# Altium PCB IC_PCB1.PcbDoc
Units mil, origin at the board's own origin, x right, y up, seen from the top; angles counter-clockwise.
Board outline 1574.8 x 1574.8 mil, 2 copper layers (Top Layer, Bottom Layer); 19 components, 16 nets, 71 pads, 0 vias.
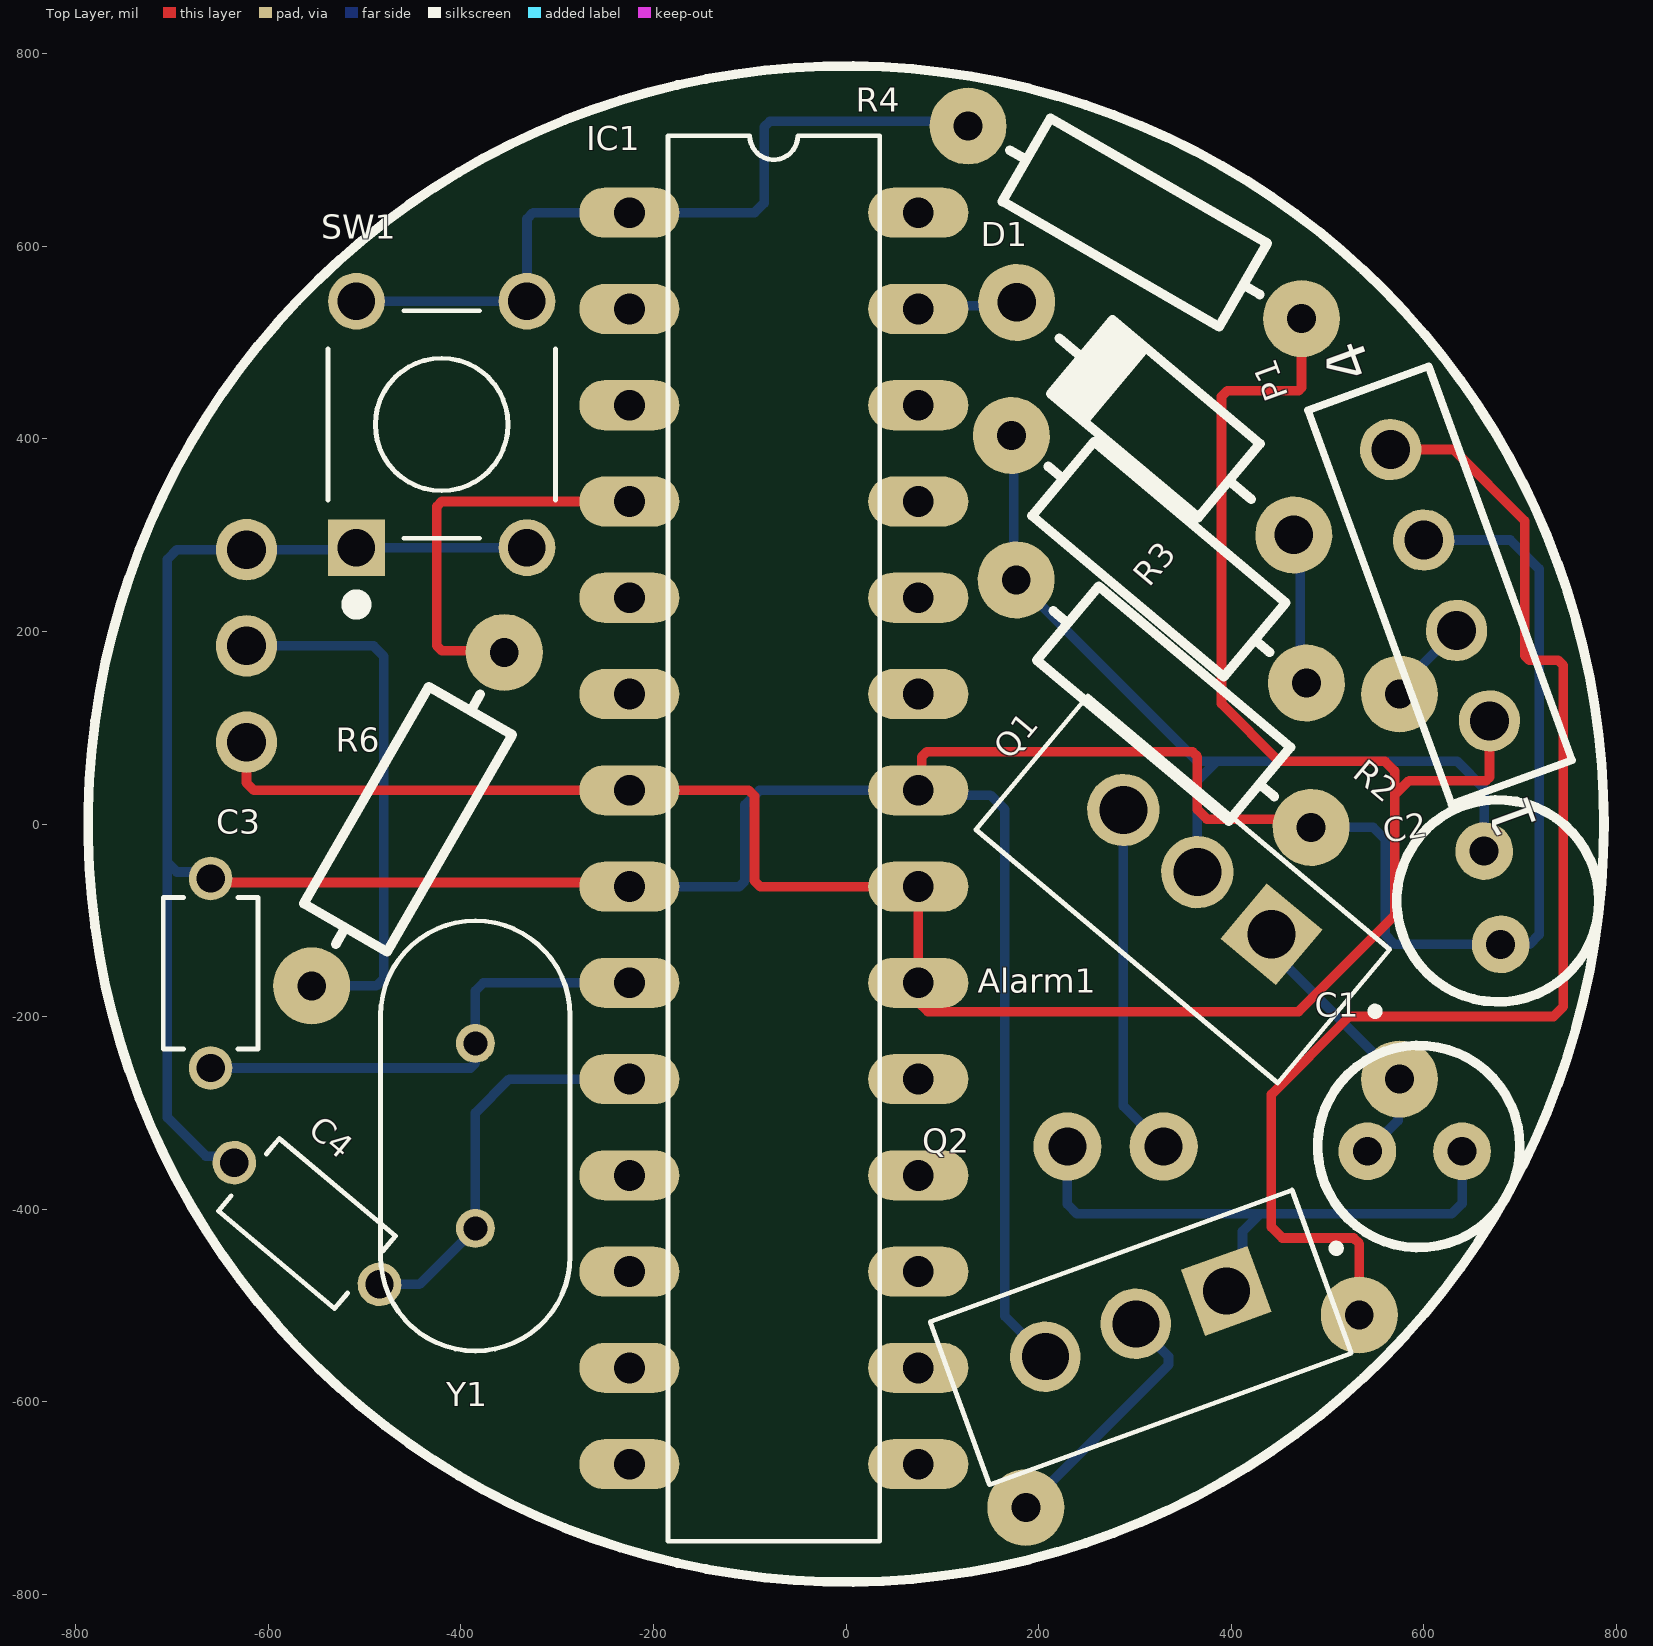
[diagram p0: Top Layer view]
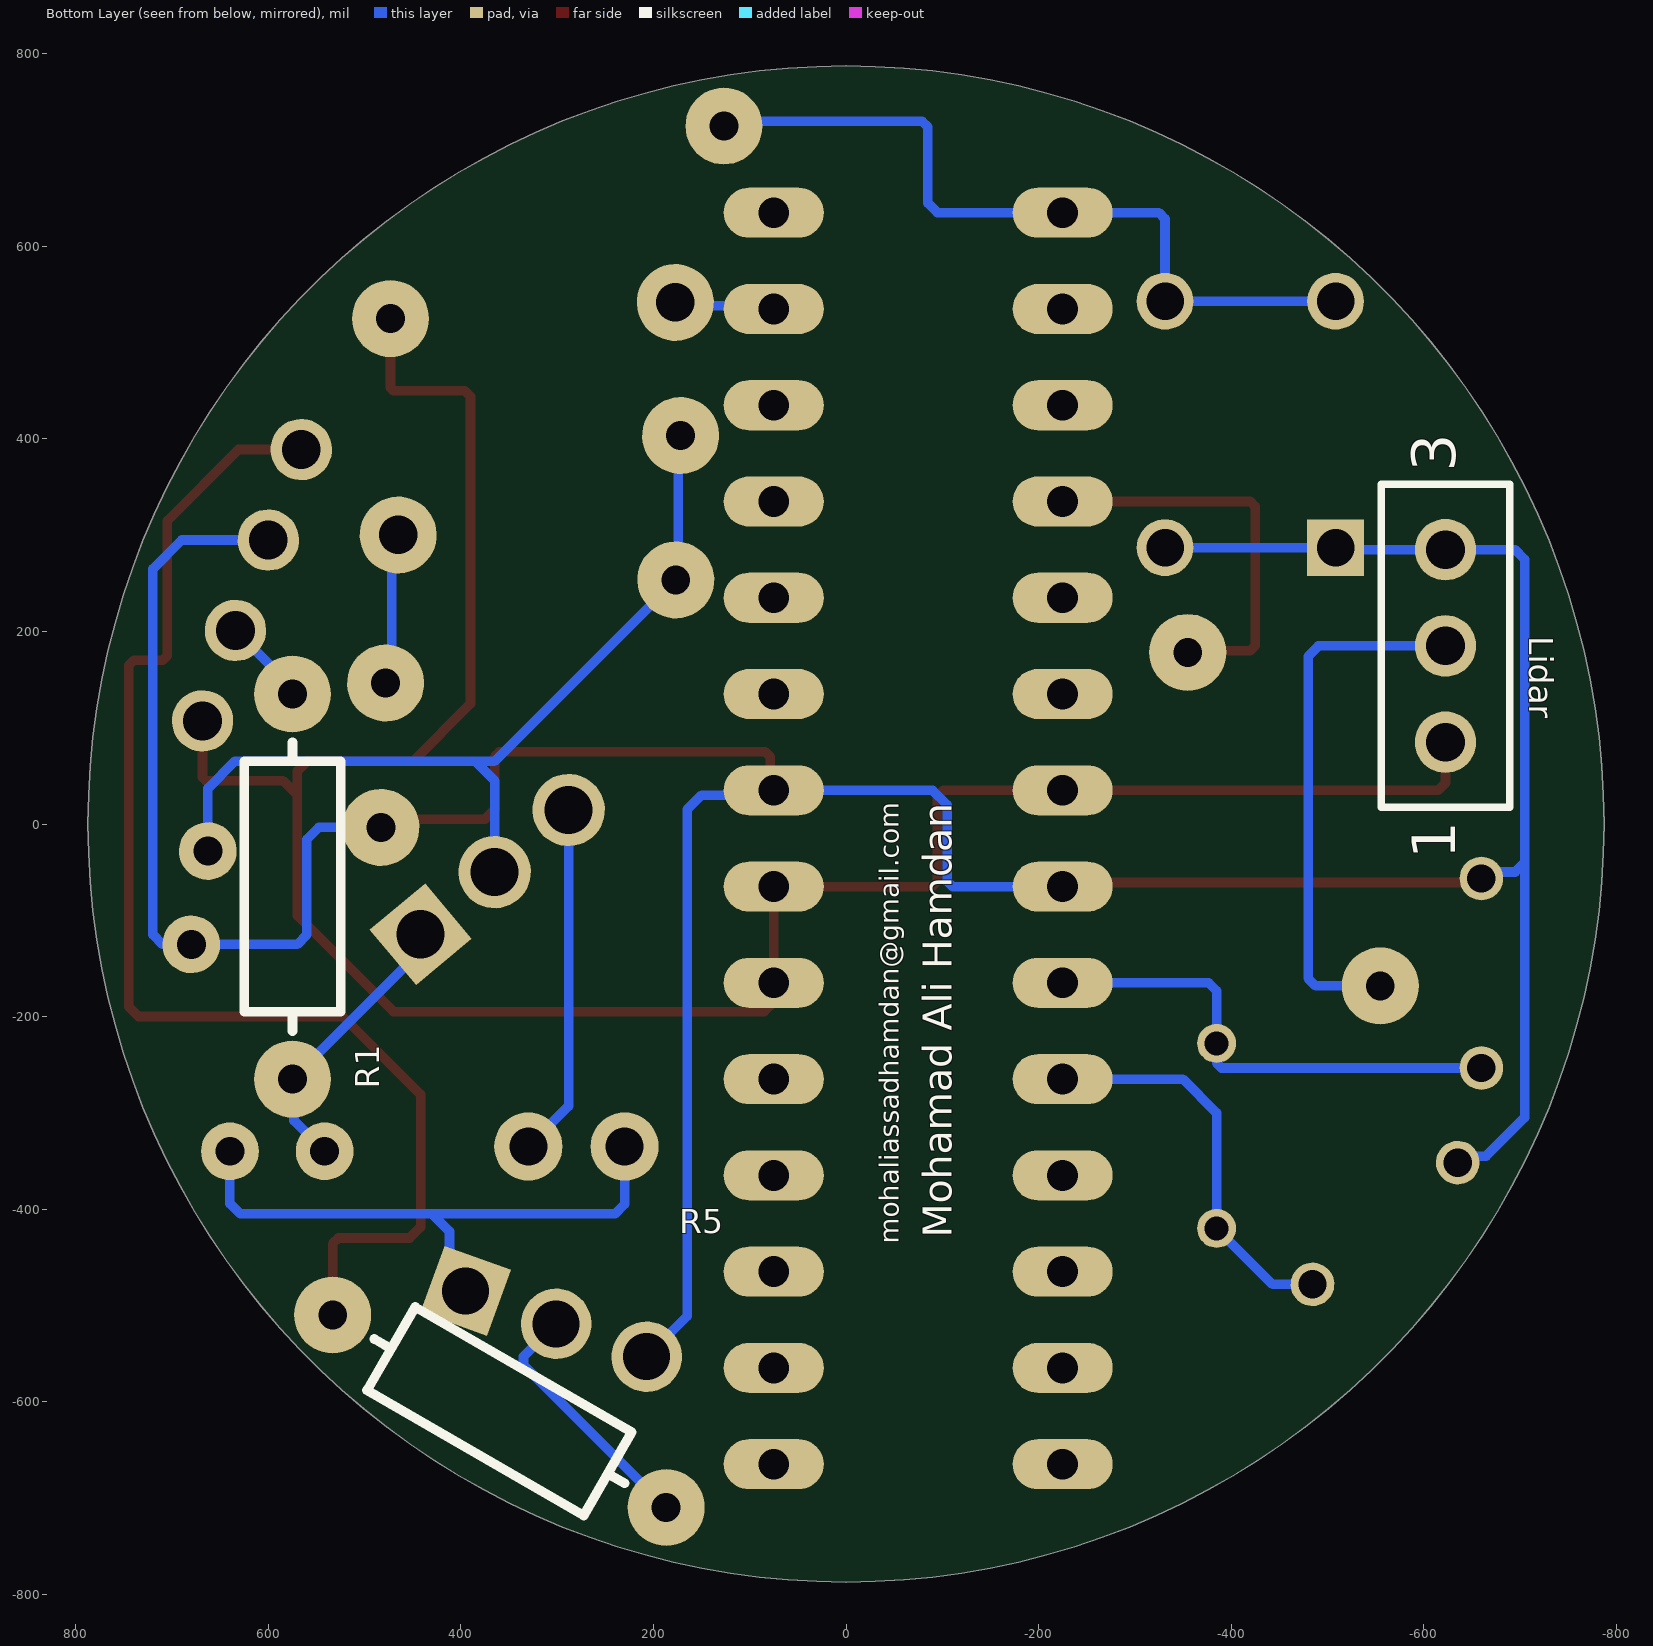
[diagram p1: Bottom Layer view, seen from below]
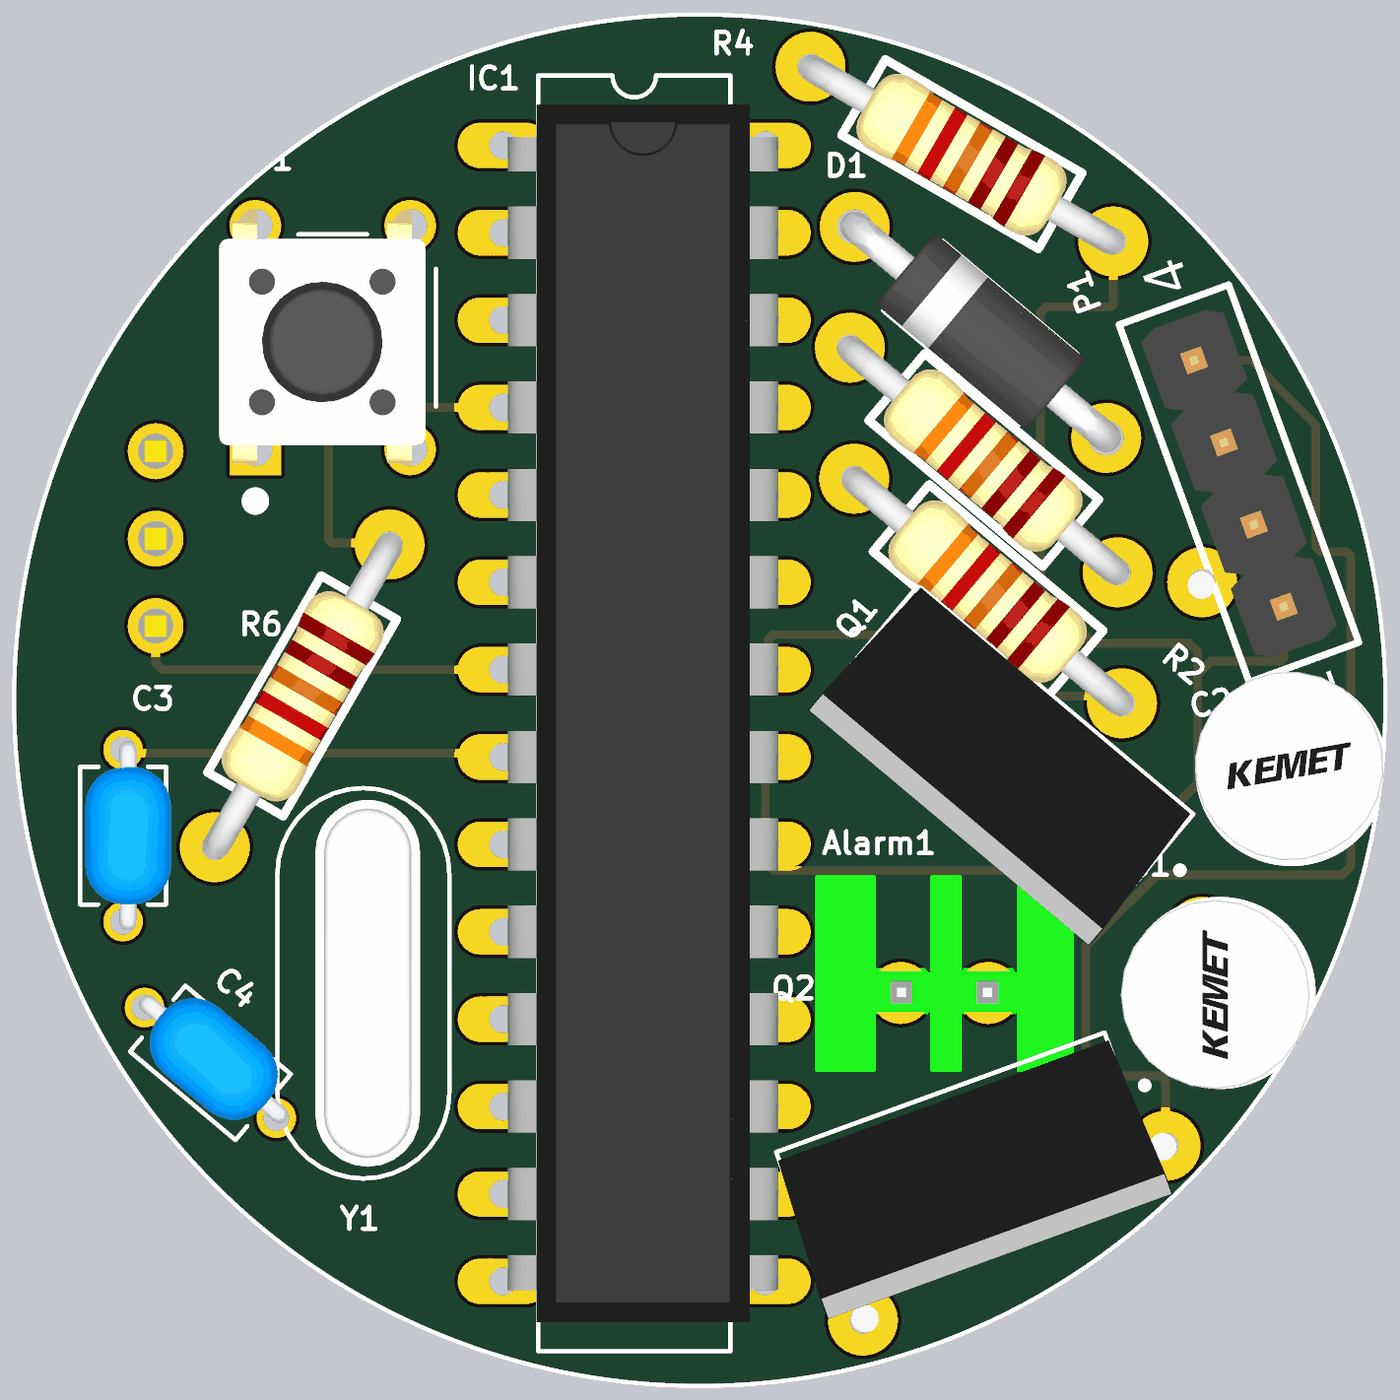
[diagram p2: 3D render of the assembled board from above, using the file's embedded part models]
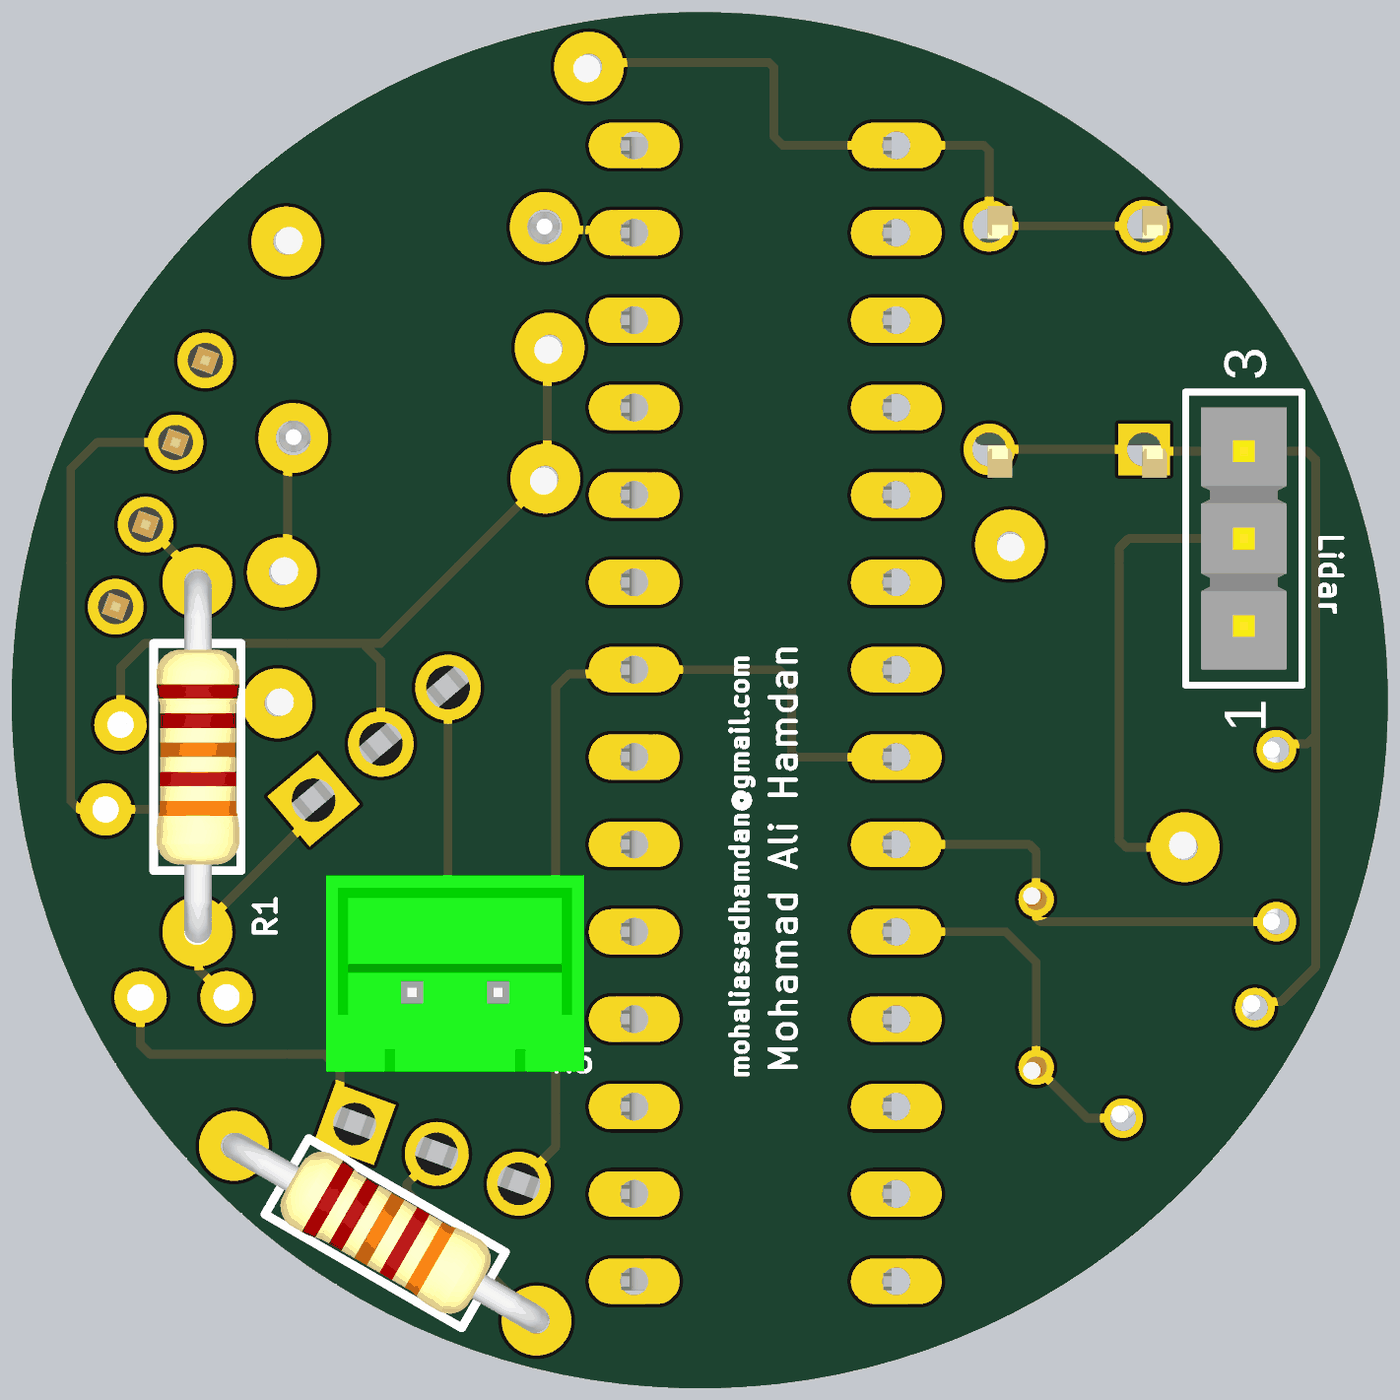
[diagram p3: 3D render of the assembled board from below, using the file's embedded part models]

## Layer stack, top to bottom
Top Solder: solder mask 0.4, Solder Resist, Dk 3.5
Top Layer: signal copper 1.4
Dielectric 1: dielectric 12.6, FR-4, Dk 4.8
Bottom Layer: signal copper 1.4
Bottom Solder: solder mask 0.4, Solder Resist, Dk 3.5

## Board outline
-787.4,0 ccw(c0,0) 0,-787.4 ccw(c0,0) 787.4,0 ccw(c0,0) 0,787.4 ccw(c0,0)

## Design rules (kind name [scope] priority, off if disabled: settings)
Clearance [All] p1: gap=10 ignorepadtopadclearanceinfootprint=FALSE except(0: Arc-Hole Track-Hole SMDPad-Hole THPad-Hole Via-Hole Fill-Hole Poly-Hole Region-Hole Text-Hole)
PolygonConnect [All] p1: connectstyle=Relief reliefconductorwidth=10 reliefentries=4 polygonreliefangle="90 Angle" airgapwidth=10
RoutingVias [All] p1: holewidth=28 width=50 viastyle="Through Hole" minholewidth=28 minwidth=50 maxholewidth=28 maxwidth=50
SolderMaskExpansion [All] p1: expansion=4
Width [All] p1: maxlimit=10 minlimit=10 preferedwidth=10
30 further rules are at their usual default settings.

## Components (designator, comment, footprint, x,y, rotation, side; value= is the part's Value field where it differs from the comment)
Alarm1 "Header 2" Connector_green_2pins 330,-335 r180 top
C1 "Cap2" Capacitor_polarized_100uF 640,-340 r180 top value=100uF
C2 "Cap2" Capacitor_polarized_100uF 680,-125 r100 top value=1uF
C3 "14pF" CAP_RDER71H333K0M1H03A -660,-155 r270 top
C4 "14pF" CAP_RDER71H333K0M1H03A -560,-415 r320 top
D1 "MBR360" "diode 4007" 430,395 r140 top
IC1 "ATMEGA328-PU" DIL28 -75,-15 r0 top
Lidar "SAMTEC-HTSW-103-07-X-SJ" SAMTEC-HTSW-103-07-X-S -622.72,185 r90 bottom
P1 "SAMTEC-HTSW-104-14-X-SJ" SAMTEC-HTSW-104-14-X-S 617.1,248.02 r110 top
Q1 "BT151" TO255P1040X460X1975-3 441.91,-114.53 r140 top
Q2 "IRL540" TO254P1054X470X1955-3 301.03,-519.2 r200 top
R1 "Res1" resistor 575,-65 r270 bottom value=10K
R2 "Res1" resistor 330,125 r140 top value=27K
R3 "Res1" resistor 325,275 r140 top value=27K
R4 "Res1" resistor 300,625 r150 top value=10K
R5 "Res1" resistor 360,-610 r210 bottom value=1K
R6 "Res1" resistor -455,5 r240 top value=1K
SW1 "FSM8JH" SW_FSM8JH -420,415 r90 top
Y1 "16MHZ" XTAL_ECS-160-20-4VX -385,-323.94 r90 top

## Footprints (in the part's own frame and the unit in brackets; to place one, negate y for a bottom-side part, rotate by r counter-clockwise, add the part's x,y. Pads: shape width x height; smd on the part's side, far side on the other; paste and mask are expansions set on the pad)
CAP_RDER71H333K0M1H03A [mm]
  round 1.15 hole 0.75: 1(-2.5,0) 2(2.5,0)
  silkscreen extent -2,-1.25 2,1.25, body extent -2.75,-1.1 3.68,4.32, height 7
Capacitor_polarized_100uF [mil] "Capacitor_polarized_100uF 25V"
  round 60 hole 30: +(98.43,0) -(0,0)
  silkscreen extent -60,-110 150,100, body extent -58,-112 158,105, height 591
Connector_green_2pins [mm] "Connector_green_2pins"
  round 1.8 hole 1: 1(0,0) 2(2.54,0)
  body extent -2.48,-3.41 5.02,2.29, height 3.3
DIL28 [mil]
  oval 104x52 hole 32: 1(-150,650) 2(-150,550) 3(-150,450) 4(-150,350) 5(-150,250) 6(-150,150) 7(-150,50) 8(-150,-50) 9(-150,-150) 10(-150,-250) 11(-150,-350) 12(-150,-450) 13(-150,-550) 14(-150,-650) 15(150,-650) 16(150,-550) 17(150,-450) 18(150,-350) 19(150,-250) 20(150,-150) 21(150,-50) 22(150,50) 23(150,150) 24(150,250) 25(150,350) 26(150,450) 27(150,550) 28(150,650)
  silkscreen extent -110,-730 110,730, body extent -145,-697 165,697, height 205
"diode 4007" [mil]
  round 80 hole 40: 1(-87.87,50) 2(287.87,50)
  silkscreen extent -30,0 230,100, body extent -104,-4 305,102, height 111
resistor [mil]
  round 80 hole 30: 1(200,0) 2(-200,0)
  silkscreen extent -150,-50 150,50, body extent -213,-46 213,48, height 91
SAMTEC-HTSW-103-07-X-S [mm]
  round 1.62 hole 1.02: 1(-2.54,0) 2(0,0) 3(2.54,0)
  silkscreen extent -4.26,-1.69 4.26,1.69, body extent -3.81,-1.24 3.81,1.24, height 8.38
SAMTEC-HTSW-104-14-X-S [mm]
  round 1.62 hole 1.02: 1(-3.81,0) 2(-1.27,0) 3(1.27,0) 4(3.81,0)
  silkscreen extent -5.53,-1.69 5.53,1.69, body extent -5.08,-1.27 5.08,1.27, height 8.77
SW_FSM8JH [mm]
  rect 1.498x1.498 hole 0.99: 1(-3.25,2.25)
  round 1.498 hole 0.99: 2(-3.25,-2.25) 3(3.25,2.25) 4(3.25,-2.25)
  silkscreen extent -4.95,-3 3,3, body extent -4.07,-2.69 3.82,3.3, height 9.5
TO254P1054X470X1955-3 [mm]
  rect 1.86x1.86 hole 1.24: 1(-2.54,0)
  round 1.86 hole 1.24: 2(0,0) 3(2.54,0)
  silkscreen extent -5.75,-1.9 5.08,2.67, body extent -5.33,-1.65 5.33,3.18, height 23.26
TO255P1040X460X1975-3 [mm]
  rect 1.91x1.91 hole 1.27: 1(0,0)
  round 1.91 hole 1.27: 2(2.55,0) 3(5.1,0)
  silkscreen extent -3.5,-1.7 7.75,2.9, body extent -2.79,-1.65 7.87,3.17, height 24.26
XTAL_ECS-160-20-4VX [mm]
  round 1.03 hole 0.63: 1(-2.44,0) 2(2.44,0)
  silkscreen extent -5.68,-2.5 5.68,2.5, body extent -5.33,-1.65 5.33,1.4, height 4.09

## Part data
Alarm1: "Header, 2-Pin", LatestRevisionDate=17-Jul-2002, LatestRevisionNote="Re-released for DXP Platform.", Publisher="Altium Limited"
C1 C2: "Capacitor", PackageDescription="Capacitor; 2 Leads", PackageReference=CAPR5-4X5, Published=23-Sep-2002, Publisher="Altium Limited"
C3 C4: library part RDER71H333K0M1H03A, "Lead capacitor X7R(EIA) with Capacitance 33000pF, Rated Voltage 50Vdc", Package="Radial Murata", Availability=Warning, BuyPart=22PF, MF=Murata, Mouser-Purchase-URL=https://snapeda.com/shop?store=Mouser&id=4546735, MP=RDER71H333K0M1H03A, Price=None, SnapEDA_Link=https://www.snapeda.com/parts/RDER71H333K0M1H03A/Murata/view-part/4546735/?ref=snap
D1: library part "Diode 10TQ035", "Schottky Rectifier", ComponentLink1Description="Manufacturer Link", ComponentLink1URL=http://www.irf.com/, ComponentLink2Description=Datasheet, ComponentLink2URL=http://www.irf.com/product-info/datasheets/data/10tq.pdf, DatasheetVersion=PD-2.057B, LatestRevisionDate=17-Jul-2002, LatestRevisionNote="Re-released for DXP Platform.", Note="Terminal 2 is the TAB and is electrically connected to the cathode", PackageDescription="TO, Thru-Hole, Vertical, Heatsink Mounted; 3 In-Line Leads (1 Absent); Pitch 2.54 mm", PackageReference=TO-220AC, PackageVersion=Feb-1998, Published=8-Jun-2000, Publisher="Altium Limited"
IC1: "AVR AVR® ATmega Microcontroller IC 8-Bit 20MHz 32KB _16K x 16_ FLASH 28-PDIP", Package="DIP-28 Microchip Technology", Availability=Unavailable, MF="Microchip Technology", MP=ATMEGA328-PU, Price=None, SnapEDA_Link=https://www.snapeda.com/parts/ATMEGA328-PU/Microchip/view-part/4327846/?ref=snap
Q1: library part SCR, "Silicon Controlled Rectifier", Code_JEDEC=TO-220-AB, LatestRevisionDate=17-Jul-2002, LatestRevisionNote="Re-released for DXP Platform.", PackageReference=TO-220-AB, Published=8-Jun-2000, Publisher="Altium Limited"
Q2: library part MOSFET-N, "N-Channel MOSFET", LatestRevisionDate=17-Jul-2002, LatestRevisionNote="Re-released for DXP Platform.", PackageDescription="TO, Flat Index; 3 In-Line, Axial Leads; Body Dia. 4.6mm; Lead Dia. 0.5 mm (max)", PackageReference=E3, PackageVersion=1995/1996, Published=8-Jun-2000, Publisher="Altium Limited"
R1 R2 R3 R4 R5 R6: "Resistor", LatestRevisionDate=17-Jul-2002, LatestRevisionNote="Re-released for DXP Platform.", PackageDescription="Axial Device, Thru-Hole; 2 Leads; 0.3 in Pin Spacing", PackageReference=AXIAL-0.3, Published=8-Jun-2000, Publisher="Altium Limited"
SW1: "Tactile Switch SPST-NO Top Actuated Through Hole", Package=None, Availability=Unavailable, MF="TE Connectivity", MP=FSM8JH, Price=None, SnapEDA_Link=https://www.snapeda.com/parts/FSM8JH/TE%20Connectivity%20ALCOSWITCH%20Switches/view-part/139741/?ref=snap, TE_purchase_URL=https://www.te.com/usa-en/product-FSM8JH.html?te_bu=Cor&te_type=disp&te_campaign=seda_glo_cor-seda-global-disp-prtnr-fy19-seda-model-bom-cta_sma-317_1&elqCampaignId=32493
Y1: library part ECS-160-20-4VX, "16MHz ±30ppm Crystal 20pF 50 Ohms HC-49/US", Package="HC49/US ECS International", Availability=Unavailable, MF="ECS Inc.", MP=ECS-160-20-4VX, Price=None, SnapEDA_Link=https://www.snapeda.com/parts/ECS-160-20-4VX/ECS%20Inc./view-part/47293/?ref=snap

## Nets (pads, with @x,y where several pads share a name; then routed paths per layer and width w, separated by ;. In a path a pad name is that pad's centre, name@x,y a point inside that pad or via, vN(x,y) a via of type N, cw(c..) or ccw(c..) an arc to the next point about the centre after c; other vN are vias at no path point)
+5V: IC1.7 IC1.20 IC1.21 Lidar.1 P1.1 R4.2 | length 2498.5
  Top Layer w10: Lidar.1 -622.72,42.72 -615,35 IC1.7 -100.86,35 -95,29.14 -95,-59.14 -89.14,-65 IC1.21 IC1.20 75,-185 85,-195 470,-195 570,-95 570,30 ; R4.2 473.21,453.21 470,450 395.86,450 390,444.14 390,125 450,65 560,65 570,55 570,30 ; P1.1 668.4,48.4 665,45 585,45 570,30
After_One_sec_ON: P1.4 R5.2 | length 1360.1
  Top Layer w10: R5.2 533.21,-435.86 527.35,-430 453.21,-430 441.91,-418.7 441.91,-280.86 522.76,-200 735,-200 745,-190 745,165 740,170 710,170 705,175 705,315 631.03,388.97 P1.4
Alarm: D1.2 IC1.27 | length 105.1
  Bottom Layer w10: IC1.27 78.37,538.37 173.97,538.37 D1.2
GND: C2.- C3.1 C4.1 IC1.8 IC1.22 Lidar.3 P1.3 Q2.3 R2.2 SW1.1 SW1.2 | length 4012.7
  Top Layer w10: C3.1 -655.79,-60.79 -229.21,-60.79 IC1.8 ; IC1.22 78.75,38.75 78.75,70 83.75,75 360,75 365,70 365,15 375,5 463.21,5 483.21,25 R2.2
  Bottom Layer w10: C3.1 -666.75,-49.83 -695.17,-49.83 -705,-40 ; C4.1 -642.15,-344.98 -665.02,-344.98 -705,-305 -705,-40 ; SW1.2 SW1.1 -510.63,285 Lidar.3 -695,285 -705,275 -705,-40 ; IC1.8 -110.86,-65 -105,-59.14 -105,20 -90,35 IC1.22 80,30 150,30 165,15 165,-511.34 Q2.3 ; R2.2 547.7,-3.56 560,-15.86 560,-115 570,-125 C2.- 710,-125 720,-115 720,265 690,295 P1.3
NetAlarm1_1: Alarm1.1 Q1.3 | length 366.9
  Bottom Layer w10: Q1.3 288.09,-293.09 Alarm1.1
NetAlarm1_2: Alarm1.2 C1.- Q2.1 | length 627.3
  Bottom Layer w10: Alarm1.2 230,-395 240,-405 430,-405 ; Q2.1 411.88,-468.12 411.88,-423.12 430,-405 ; C1.- 640,-394.2 629.2,-405 430,-405
NetC1_1: C1.+ Q1.1 R1.1 | length 294.4
  Bottom Layer w10: Q1.1 441.91,-131.91 R1.1 573.39,-266.61 573.39,-308.18 C1.+
NetC2_1: C2.+ Q1.2 R2.1 R3.1 | length 916.3
  Bottom Layer w10: R3.1 174.29,401.06 174.29,256.06 R2.1 365.35,65 385,65 ; Q1.2 365,45 385,65 ; C2.+ 662.91,37.09 635,65 385,65
NetC3_2: C3.2 IC1.9 Y1.2 | length 515.7
  Bottom Layer w10: C3.2 -390,-253.43 -385,-248.43 Y1.2 -385,-173.21 -376.79,-165 IC1.9
NetC4_2: C4.2 IC1.10 Y1.1 | length 418.2
  Bottom Layer w10: C4.2 -443.27,-478.27 Y1.1 -385,-300 -350,-265 IC1.10
NetD1_1: D1.1 R3.2 | length 159.2
  Bottom Layer w10: D1.1 471.69,293.7 471.69,152.96 R3.2
NetIC1_1: IC1.1 R4.1 SW1.3 SW1.4 | length 811.4
  Bottom Layer w10: SW1.3 SW1.4 -331.42,628.58 -325,635 IC1.1 -95,635 -85,645 -85,724.14 -79.14,730 121.79,730 R4.1
NetIC1_4: IC1.4 R6.2 | length 429.5
  Top Layer w10: R6.2 -356.8,180 -420,180 -425,185 -425,330 -420,335 IC1.4
  Bottom Layer w10: R6.2@-361.8,185 R6.2
NetQ2_2: Q2.2 R5.1 | length 266.3
  Bottom Layer w10: R5.1 335,-561.79 335,-553.17 Q2.2
Pic: Lidar.2 R6.1 | length 560
  Bottom Layer w10: Lidar.2 -490.86,185 -480,174.14 -480,-160.4 -487.81,-168.21 R6.1
Vturbine: P1.2 R1.2 | length 90.6
  Bottom Layer w10: R1.2 575,141.83 P1.2
pads on no net: IC1.2 IC1.3 IC1.5 IC1.6 IC1.11 IC1.12 IC1.13 IC1.14 IC1.15 IC1.16 IC1.17 IC1.18 IC1.19 IC1.23 IC1.24 IC1.25 IC1.26 IC1.28

## Silkscreen, mask and mechanical layers (free items; w line width, h text height)
Top Overlay:
  circle w10: c0,0 r787.4
Bottom Overlay:
  text "Mohamad Ali Hamdan" at -110,-430 h30 r270
  text "mohaliassadhamdan@gmail.com" at -55,-435.86 h20 r270

## Text inside footprints (layer, text, board x,y; h text height)
Lidar: Mechanical 40 "7.620" at -745,159.02 h15.5 r270; Mechanical 40 "5.080" at -517.72,-18.5 h15.5 r270; Mechanical 40 "2.540" at -540.2,-15.98 h15.5 r270; Mechanical 40 "2.489" at -627.72,-177.99 h15.5 r270; Mechanical 16 "3" at -647.72,366.14 h77.5 r270; Mechanical 16 "1" at -647.72,-36.65 h77.5 r270; Bottom Overlay "3" at -647.72,366.14 h77.5 r270; Bottom Overlay "1" at -647.72,-36.65 h77.5 r270
P1: Top Overlay "4" at 561.54,473.77 h77.5 r110; Top Overlay "1" at 733.5,1.3 h77.5 r110; Mechanical 40 "7.620" at 527.32,187.69 h15.5 r110; Mechanical 40 "10.160" at 742.78,260.24 h15.5 r110; Mechanical 40 "2.540" at 625.4,-16.05 h15.5 r110; Mechanical 40 "2.489" at 763.05,-138.36 h15.5 r110; Mechanical 16 "4" at 561.54,473.77 h77.5 r110; Mechanical 16 "1" at 733.5,1.3 h77.5 r110